# Altium PCB COMMS_ECU_revA.PcbDoc (part 4 of 6)
Units mm, origin at the board's own origin, x right, y up, seen from the top; angles counter-clockwise.
Board outline 370 x 261 mm, 6 copper layers (Top Layer, Mid Layer 1, Mid Layer 2, Mid Layer 3, Mid Layer 4, Bottom Layer), stack 1.538 mm thick; 739 components, 500 nets, 2454 pads, 325 vias.
Unrouted connection lines stored in the file: 1573.
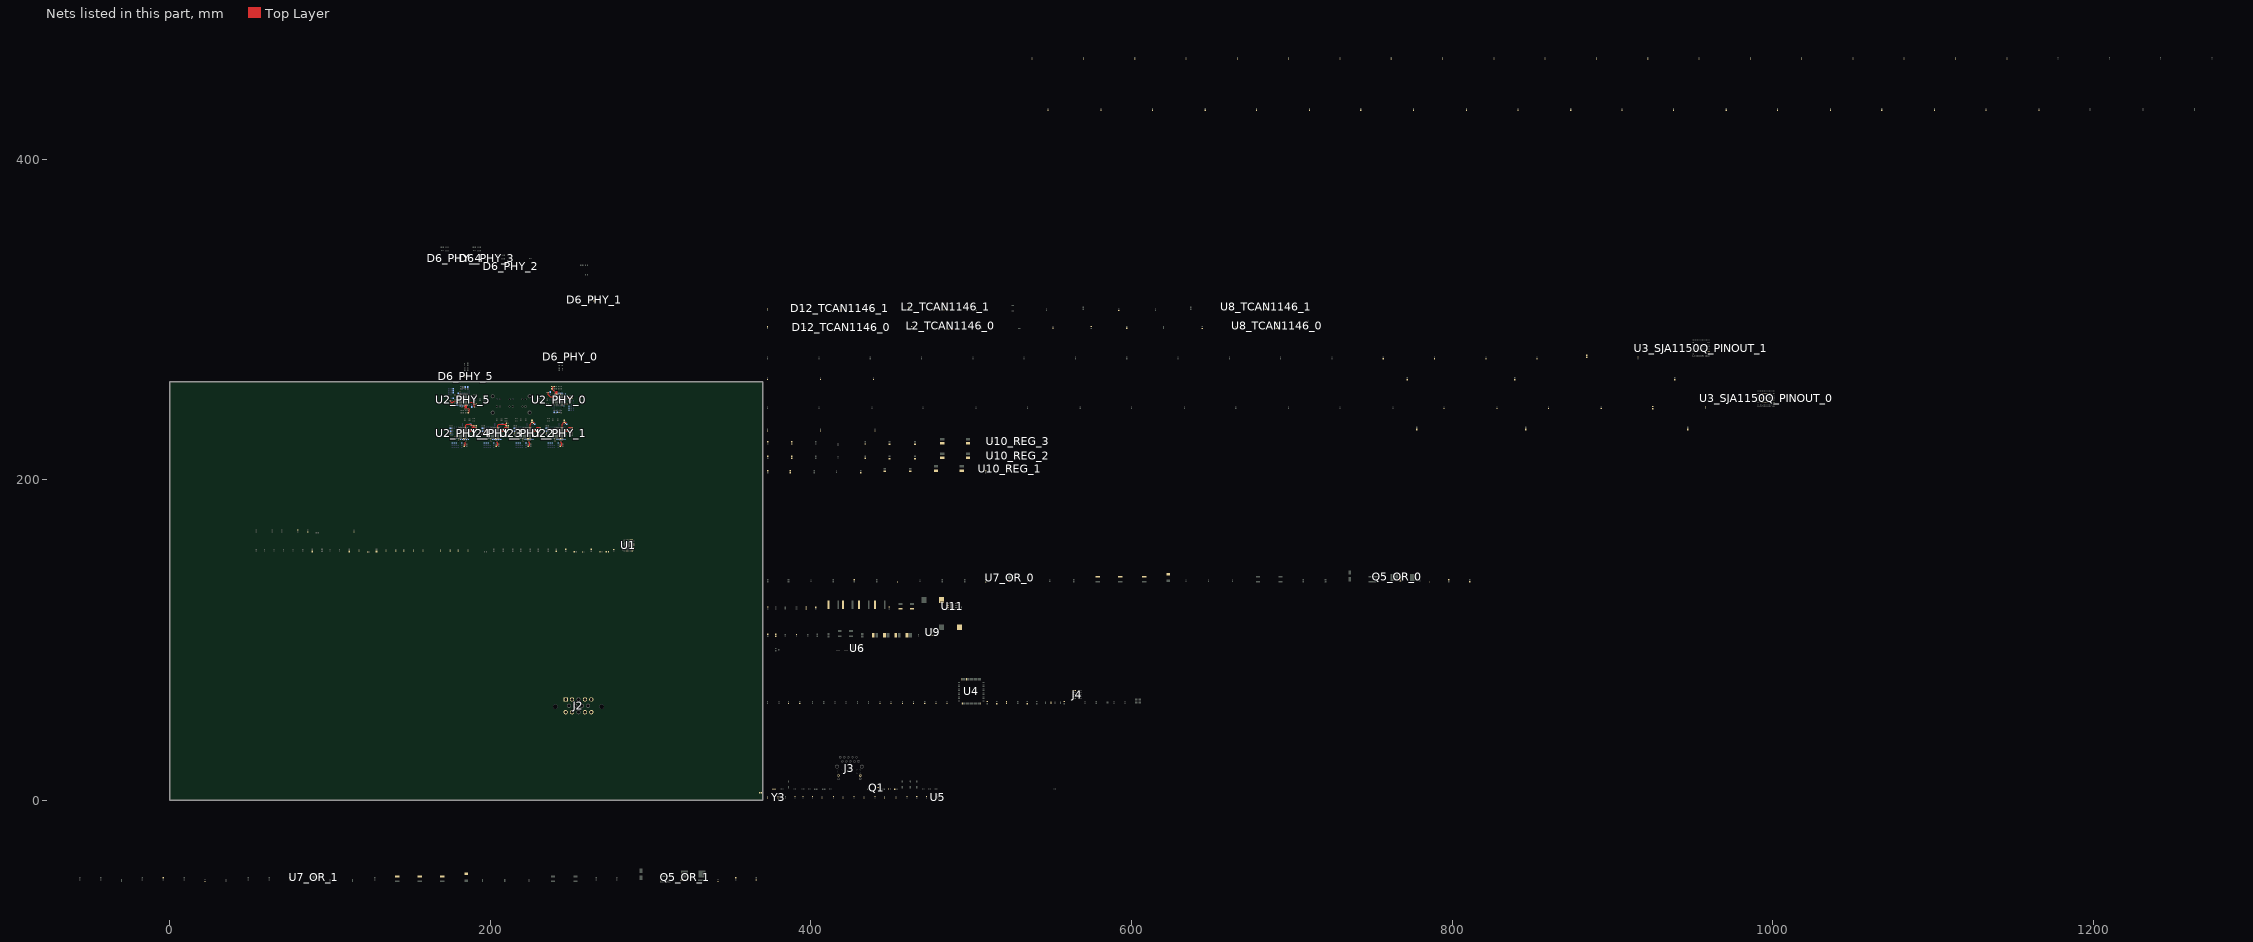
[diagram p3: the nets of this part, all layers, seen from the top]

## Via types
v1: diameter 0.5, hole 0.3, Top Layer to Bottom Layer, 319 vias
v2: diameter 0.66, hole 0.33, Top Layer to Bottom Layer, tented top, 6 vias

## Nets (pads, with @x,y where several pads share a name; then routed paths per layer and width w, separated by ;. In a path a pad name is that pad's centre, name@x,y a point inside that pad or via, vN(x,y) a via of type N, cw(c..) or ccw(c..) an arc to the next point about the centre after c; other vN are vias at no path point) (continued)
3V3_AUX_PWR: D4.1 R1.1
3V3_CAN0_RX: U8_TCAN1146_0.4
3V3_CAN0_TX: U8_TCAN1146_0.1
3V3_CAN1_RX: U8_TCAN1146_1.4
3V3_CAN1_TX: U8_TCAN1146_1.1
3V3_CAR_APM_I_SENSE: D10_OR_1.1 R77_OR_1.2 U7_OR_1.10
3V3_CAR_APM_V_SENSE: D8_OR_1.1 R67_OR_1.1 R68_OR_1.2
3V3_CAR_OR_nFLT: R73_OR_0.1 U7_OR_0.12
3V3_CAR_VCC_I_SENSE: D10_OR_0.1 R77_OR_0.2 U7_OR_0.10
3V3_CAR_VCC_V_SENSE: D8_OR_0.1 R67_OR_0.1 R68_OR_0.2
3V3_INPUT_I_SENSE: U6.7
3V3_INPUT_V_SENSE: D7.1 R62.1 R63.2
3V3_INT: C153_TCAN1146_0.1 C153_TCAN1146_1.1 R73_OR_0.2 R73_OR_1.2 U8_TCAN1146_0.5 U8_TCAN1146_1.5
3V3_LAN8830_CLK: C10.2 R57.2
3V3_LAN8830_nINT: U1.39
3V3_LAN8830_nRST: C11.1 R8.2 U1.43
3V3_LAN8870_0_CLK: C34_PHY_0.2 R51.2
3V3_LAN8870_0_nIRQ: U2_PHY_0.35 | length 2.6
  Top Layer w0.2: v1(240.25,255.75) 240.75,255.25 U2_PHY_0.35@240.75,253.4
3V3_LAN8870_0_nRST: C35_PHY_0.1 R26_PHY_0.2 U2_PHY_0.39 | length 5.5
  Top Layer w0.2: C35_PHY_0.1@235.979,254.5 236.15,254.329 236.15,253 ; 236.15,252.925 237.325,251.75 U2_PHY_0.39@239.6,251.75
3V3_LAN8870_1_CLK: C34_PHY_1.2 R52.2
3V3_LAN8870_1_nIRQ: U2_PHY_1.35 | length 2.6
  Top Layer w0.2: U2_PHY_1.35@246.4,231.25 248.25,231.25 v1(248.75,231.75)
3V3_LAN8870_1_nRST: C35_PHY_1.1 R26_PHY_1.2 U2_PHY_1.39 | length 5.5
  Top Layer w0.2: U2_PHY_1.39@244.75,232.4 244.75,234.675 R26_PHY_1.2@245.925,235.85 ; R26_PHY_1.2@246,235.85 247.329,235.85 247.5,236.021
3V3_LAN8870_2_CLK: C34_PHY_2.2 R53.2
3V3_LAN8870_2_nIRQ: U2_PHY_2.35 | length 2.6
  Top Layer w0.2: U2_PHY_2.35@226.4,231.25 228.25,231.25 v1(228.75,231.75)
3V3_LAN8870_2_nRST: C35_PHY_2.1 R26_PHY_2.2 U2_PHY_2.39 | length 5.5
  Top Layer w0.2: U2_PHY_2.39@224.75,232.4 224.75,234.675 R26_PHY_2.2@225.925,235.85 ; R26_PHY_2.2@226,235.85 227.329,235.85 227.5,236.021
3V3_LAN8870_3_CLK: C34_PHY_3.2 R54.2
3V3_LAN8870_3_nIRQ: U2_PHY_3.35 | length 2.6
  Top Layer w0.2: U2_PHY_3.35@206.4,231.25 208.25,231.25 v1(208.75,231.75)
3V3_LAN8870_3_nRST: C35_PHY_3.1 R26_PHY_3.2 U2_PHY_3.39 | length 8.8
  Top Layer w0.2: U2_PHY_3.39@204.75,232.4 204.75,234 205.25,234.5 209.175,234.5 209.75,233.925 R26_PHY_3.2@209.75,233.75 ; R26_PHY_3.2@209.85,233.75 209.85,235.1 C35_PHY_3.1@210,235.25
3V3_LAN8870_4_CLK: C34_PHY_4.2 R55.2
3V3_LAN8870_4_nIRQ: U2_PHY_4.35 | length 2.6
  Top Layer w0.2: U2_PHY_4.35@186.4,231.25 188.25,231.25 v1(188.75,231.75)
3V3_LAN8870_4_nRST: C35_PHY_4.1 R26_PHY_4.2 U2_PHY_4.39 | length 7.4
  Top Layer w0.2: U2_PHY_4.39@184.75,232.4 184.75,234 185.25,234.5 187.75,234.5 C35_PHY_4.1@188.5,233.75 ; C35_PHY_4.1@188.479,233.75 C35_PHY_4.1@188.5,233.75 ; R26_PHY_4.2@189.75,233.925 R26_PHY_4.2@189.75,233.75 ; R26_PHY_4.2@189.85,233.75 R26_PHY_4.2@189.75,233.75 ; C35_PHY_4.1@188.5,233.75 R26_PHY_4.2@189.75,233.75
3V3_LAN8870_5_CLK: C34_PHY_5.2 R56.2
3V3_LAN8870_5_nIRQ: U2_PHY_5.35 | length 2.6
  Top Layer w0.2: U2_PHY_5.35@185.25,246.6 185.25,244.75 v1(185.75,244.25)
3V3_LAN8870_5_nRST: C35_PHY_5.1 R26_PHY_5.2 U2_PHY_5.39 | length 5.5
  Top Layer w0.2: U2_PHY_5.39@186.4,248.25 188.675,248.25 R26_PHY_5.2@189.85,247.075 ; R26_PHY_5.2@189.85,247 189.85,245.671 C35_PHY_5.1@190.021,245.5
3V3_LED: D6_PHY_0.2 D6_PHY_0.3 D6_PHY_1.2 D6_PHY_1.3 D6_PHY_2.2 D6_PHY_2.3 D6_PHY_3.2 D6_PHY_3.3 D6_PHY_4.2 D6_PHY_4.3 D6_PHY_5.2 D6_PHY_5.3
3V3_MDC: R7.1 U1.37 U2_PHY_0.34 U2_PHY_1.34 U2_PHY_2.34 U2_PHY_3.34 U2_PHY_4.34 U2_PHY_5.34 U4.16 | length 14.7
  Top Layer w0.2: U2_PHY_5.34@184.75,246.6 184.75,244.581 185,244.331 v1(185,244.25) ; U2_PHY_4.34@186.4,230.75 188.419,230.75 188.669,231 v1(188.75,231) ; U2_PHY_3.34@206.4,230.75 208.419,230.75 208.669,231 v1(208.75,231) ; U2_PHY_2.34@226.4,230.75 228.419,230.75 228.669,231 v1(228.75,231) ; v1(241,255.75) 241,255.669 241.25,255.419 U2_PHY_0.34@241.25,253.4 ; U2_PHY_1.34@246.4,230.75 248.419,230.75 248.669,231 v1(248.75,231)
3V3_MDIO: R6.1 U1.38 U2_PHY_0.33 U2_PHY_1.33 U2_PHY_2.33 U2_PHY_3.33 U2_PHY_4.33 U2_PHY_5.33 U4.24 | length 14.1
  Top Layer w0.2: v1(184.25,244.25) U2_PHY_5.33@184.25,246.6 ; U2_PHY_4.33@186.4,230.25 v1(188.75,230.25) ; U2_PHY_3.33@206.4,230.25 v1(208.75,230.25) ; U2_PHY_2.33@226.4,230.25 v1(228.75,230.25) ; U2_PHY_0.33@241.75,253.4 v1(241.75,255.75) ; U2_PHY_1.33@246.4,230.25 v1(248.75,230.25)
3V3_SJA1105_0_CLK: C59_SJA1150Q_PINOUT_0.2 R58.2
3V3_SJA1105_1_CLK: C59_SJA1150Q_PINOUT_1.2 R59.2
3V3_SJA1150Q_0_nCS: U3_SJA1150Q_PINOUT_0.N6
3V3_SJA1150Q_0_nRST: R45_SJA1150Q_PINOUT_0.1 U3_SJA1150Q_PINOUT_0.P3
3V3_SJA1150Q_1_nCS: U3_SJA1150Q_PINOUT_1.N6
3V3_SJA1150Q_1_nRST: R45_SJA1150Q_PINOUT_1.1 U3_SJA1150Q_PINOUT_1.P3
3V3_SJA1150Q_MISO: U3_SJA1150Q_PINOUT_0.P4 U3_SJA1150Q_PINOUT_1.P4
3V3_SJA1150Q_MOSI: U3_SJA1150Q_PINOUT_0.N5 U3_SJA1150Q_PINOUT_1.N5
3V3_SJA1150Q_SCLK: U3_SJA1150Q_PINOUT_0.P5 U3_SJA1150Q_PINOUT_1.P5
3V3_TCAN1146_0_nCS: U8_TCAN1146_0.14
3V3_TCAN1146_1_nCS: U8_TCAN1146_1.14
3V3_TCAN1146_MISO: U8_TCAN1146_0.6 U8_TCAN1146_1.6
3V3_TCAN1146_MOSI: U8_TCAN1146_0.11 U8_TCAN1146_1.11
3V3_TCAN1146_SCLK: U8_TCAN1146_0.8 U8_TCAN1146_1.8
3V3_TCAN1146_WAKE: C155_TCAN1146_0.1 Q1.3 R81_TCAN1146_0.1 R82_TCAN1146_0.2 SW3_TCAN1146_0.2
5V0_INT: C152_TCAN1146_0.1 C152_TCAN1146_1.1 U8_TCAN1146_0.3 U8_TCAN1146_1.3
8830_1V1: C18.1 C19.1 C20.1 C21.1 C22.1 FB3.1 FB5.1 U1.23 U1.27 U1.31 U1.40
8870_1V1: C38_PHY_0.1 C38_PHY_1.1 C38_PHY_2.1 C38_PHY_3.1 C38_PHY_4.1 C38_PHY_5.1 C39_PHY_0.1 C39_PHY_1.1 C39_PHY_2.1 C39_PHY_3.1 C39_PHY_4.1 C39_PHY_5.1 C40_PHY_0.1 C40_PHY_1.1 C40_PHY_2.1 C40_PHY_3.1 C40_PHY_4.1 C40_PHY_5.1 C41_PHY_0.1 C41_PHY_1.1 C41_PHY_2.1 C41_PHY_3.1 C41_PHY_4.1 C41_PHY_5.1 C46_PHY_0.1 C46_PHY_1.1 C46_PHY_2.1 C46_PHY_3.1 C46_PHY_4.1 C46_PHY_5.1 C47_PHY_0.1 C47_PHY_1.1 C47_PHY_2.1 C47_PHY_3.1 C47_PHY_4.1 C47_PHY_5.1 FB8_PHY_0.1 FB8_PHY_1.1 FB8_PHY_2.1 FB8_PHY_3.1 FB8_PHY_4.1 FB8_PHY_5.1 U2_PHY_0.10 U2_PHY_0.19 U2_PHY_0.22 U2_PHY_0.29 U2_PHY_1.10 U2_PHY_1.19 U2_PHY_1.22 U2_PHY_1.29 U2_PHY_2.10 U2_PHY_2.19 U2_PHY_2.22 U2_PHY_2.29 U2_PHY_3.10 U2_PHY_3.19 U2_PHY_3.22 U2_PHY_3.29 U2_PHY_4.10 U2_PHY_4.19 U2_PHY_4.22 U2_PHY_4.29 U2_PHY_5.10 U2_PHY_5.19 U2_PHY_5.22 U2_PHY_5.29
  other v1: 183.25,224 185,224 203.25,224 205,224 223.25,224 225,224 243.25,224 245,224 178,227 198,227 218,227 238,227 188,228.25 208,228.25 228,228.25 248,228.25 182.25,245 245,245 178,248 178,249.75 248,250.25 248,252 181,255 243.75,255
APM_VCC: C145_OR_1.2 C146_OR_1.2 C147_OR_1.2 D9_OR_1.2 J2.1 J2.2 Q5_OR_1.1-2-3 U7_OR_1.2
BOOT: C114.1 R47.1 R49.2 U4.94
CAN0_N: C156_TCAN1146_0.1 D12_TCAN1146_0.1 J2.11 L2_TCAN1146_0.4 R83_TCAN1146_0.2
CAN0_P: C158_TCAN1146_0.2 D12_TCAN1146_0.2 J2.10 L2_TCAN1146_0.1 R84_TCAN1146_0.1
CAN1_N: C156_TCAN1146_1.1 D12_TCAN1146_1.1 J2.14 L2_TCAN1146_1.4 R83_TCAN1146_1.2
CAN1_P: C158_TCAN1146_1.2 D12_TCAN1146_1.2 J2.13 L2_TCAN1146_1.1 R84_TCAN1146_1.1
CAR_VCC: C145_OR_0.2 C146_OR_0.2 C147_OR_0.2 D9_OR_0.2 J2.4 J2.5 Q5_OR_0.1-2-3 U7_OR_0.2